# EAGLE board P2P Communication BW Traffic and Pedestrian (EAGLE 9.7.0)

Size 242.16 x 175.96 mm. Coordinates in mm from the lower left corner, seen from the top.
Outline: 0,0 242.16,0 242.16,175.96 0,175.96 0,0
Copper layers (1*16): Top 0.035mm / dielectric 1.5mm / Bottom 0.035mm
Design rules "default": minimum track width 6mil, minimum drill 0.35mm, track to track 6mil, track to pad 6mil, pad to pad 6mil, via to via 6mil, smd to smd 6mil, copper to edge 40mil, drill to drill 6mil, minimum pad ring 10mil, minimum via ring 8mil, stop-mask expansion 4mil, vias tented up to drill 0mil, thermal gap 10mil

## Footprints (pad centres in the part's own frame; a part is rotated, then mirrored left to right if it is on the bottom)
LEDRD254W60D565H860B_G = drill 0.981 pad 1.581: 1 -1.27,0; 2 1.27,0
LEDRD254W60D565H860B = drill 0.981 pad 1.581: 1 -1.27,0; 2 1.27,0
LEDRD254W60D565H860B_Y = drill 0.981 pad 1.581: 1 -1.27,0; 2 1.27,0
RESAD1016W63L850D250B = drill 0.83 pad 1.43: 1 -5.08,0; 2 5.08,0
SWITCH-MOMENTARY-PTH-6.5MM = drill 1.016 pad 1.88: 1 -3.251,2.261; 2 3.251,2.261; 3 -3.251,-2.261; 4 3.251,-2.261
ARDUINO-UNO-R3-SHIELD = drill 1.016 pad 1.88: 3.3V 24.13,-2.54; 5V 24.13,0; A0 24.13,12.7; A1 24.13,15.24; A2 24.13,17.78; A3 24.13,20.32; A4 24.13,22.86; A5 24.13,25.4; AREF -24.13,-13.97; D2 -24.13,20.32; D3 -24.13,17.78; D4 -24.13,15.24; D5 -24.13,12.7; D6 -24.13,10.16; D7 -24.13,7.62; D8 -24.13,3.81; D9 -24.13,1.27; D10 -24.13,-1.27; D11 -24.13,-3.81; D12 -24.13,-6.35; D13 -24.13,-8.89; GND@0 24.13,2.54; GND@1 24.13,5.08; GND@2 -24.13,-11.43; IOREF 24.13,-7.62; NC 24.13,-10.16; RES 24.13,-5.08; RX -24.13,25.4; SCL -24.13,-19.05; SDA -24.13,-16.51; TX -24.13,22.86; VIN 24.13,7.62

## Placement (x,y rotation side)
D4  GREEN  [LEDRD254W60D565H860B_G]  236.1,168.05 180 top
D5  RED  [LEDRD254W60D565H860B]  231.02,168.05 180 top
D6  RED  [LEDRD254W60D565H860B]  175.14,150.27 180 top
D7  YELLOW  [LEDRD254W60D565H860B_Y]  195.46,150.27 180 top
D8  GREEN  [LEDRD254W60D565H860B_G]  215.78,150.27 180 top
R1  1k  [RESAD1016W63L850D250B]  229.75,137.57 90 top
R2  1k  [RESAD1016W63L850D250B]  234.83,137.57 90 top
R6  1k  [RESAD1016W63L850D250B]  214.51,137.57 90 top
R7  1k  [RESAD1016W63L850D250B]  194.19,137.57 90 top
R8  1k  [RESAD1016W63L850D250B]  173.87,137.57 90 top
S1  SWITCH_MOMENTARY  [SWITCH-MOMENTARY-PTH-6.5MM]  227.23,84.69 270 top
U1  ARDUINO-UNO-R3-SHIELD  [ARDUINO-UNO-R3-SHIELD]  171.7,29.84 270 top
U2  ARDUINO-UNO-R3-SHIELD  [ARDUINO-UNO-R3-SHIELD]  47.88,68.79 270 top

## Library data of the parts
D4 D8 = Tinkercad; CATEGORY: Opto-Electronic; SUB-CATEGORY: LED; VALUE: LED_GREEN
D5 D6 = Tinkercad; CATEGORY: Opto-Electronic; SUB-CATEGORY: LED; VALUE: LED_RED
D7 = Tinkercad; CATEGORY: Opto-Electronic; SUB-CATEGORY: LED; VALUE: LED_YELLOW
R1 R2 R6-R8 S1 U1 U2 = Tinkercad

## Nets
D4_C: D4.2 R2.2
D5_C: D5.2 R1.2
D6_C: D6.2 R8.2
D7_C: D7.2 R7.2
D8_C: D8.2 R6.2
U1_D7: S1.1 S1.2 U1.D7
U1_GND: R1.1 R2.1 R6.1 R7.1 R8.1 S1.3 S1.4 U1.GND@0 U1.GND@1 U1.GND@2 U2.GND@0 U2.GND@1 U2.GND@2
U1_RX: U1.RX U2.TX
U1_TX: U1.TX U2.RX
U2_D2: D8.1 U2.D2
U2_D3: D7.1 U2.D3
U2_D4: D6.1 U2.D4
U2_D5: D5.1 U2.D5
U2_D6: D4.1 U2.D6

## Tracks (layer width: path | path; a pad name or v marks a point on that pad's centre or on a via)
D4_C  (1 unrouted)
D5_C  (1 unrouted)
D6_C  (1 unrouted)
D7_C  (1 unrouted)
D8_C  (1 unrouted)
U1_D7  (2 unrouted)
U1_GND  (12 unrouted)
U1_RX  (1 unrouted)
U1_TX  (1 unrouted)
U2_D2  (1 unrouted)
U2_D3  (1 unrouted)
U2_D4  (1 unrouted)
U2_D5  (1 unrouted)
U2_D6  (1 unrouted)